# Altium PCB 12-LedMatrix(74138+74595).PcbDoc
Units mm, origin at the board's own origin, x right, y up, seen from the top; angles counter-clockwise.
Board outline 80 x 39.8 mm, 2 copper layers (Top Layer, Bottom Layer); 44 components, 102 nets, 315 pads, 32 vias.
Unrouted connection lines stored in the file: 180.
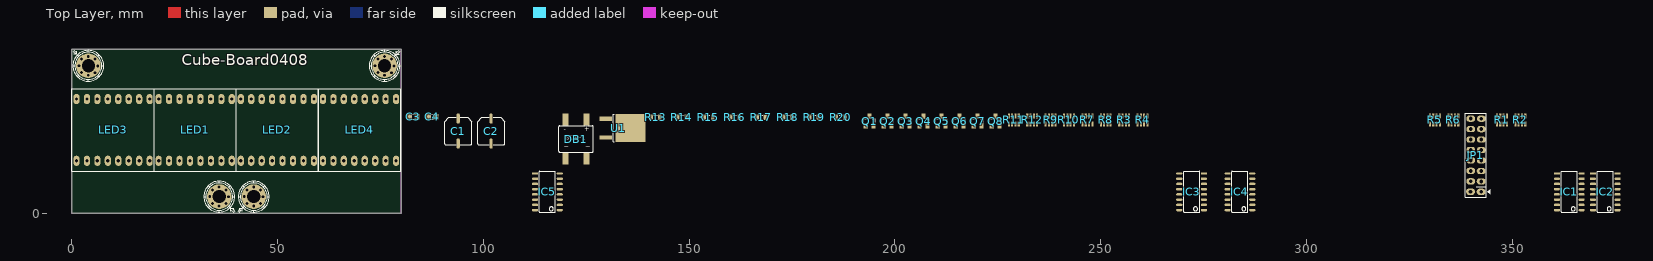
[diagram p0: Top Layer view]
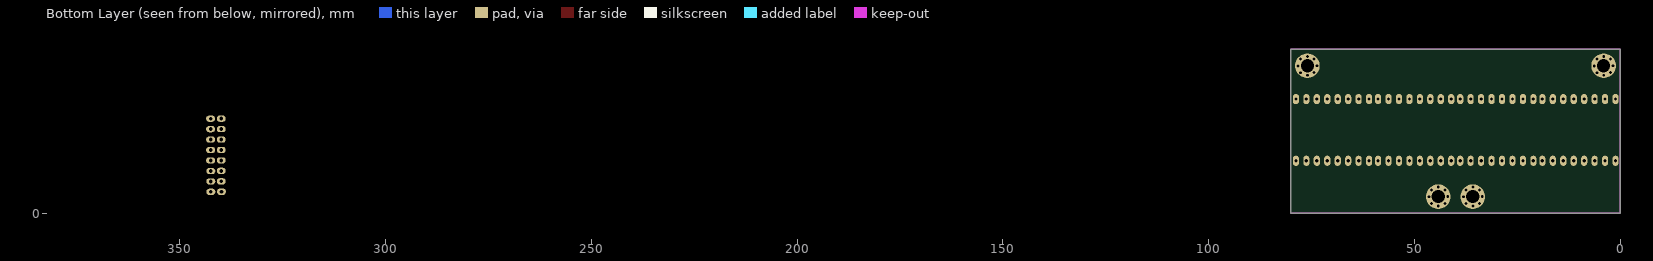
[diagram p1: Bottom Layer view, seen from below]

## Layer stack, top to bottom
Top Solder: solder mask 0.0102, Solder Resist, Dk 3.5
Top Layer: signal copper 0.0356
Dielectric 1: dielectric 0.32, FR-4, Dk 4.8
Bottom Layer: signal copper 0.0356
Bottom Solder: solder mask 0.0102, Solder Resist, Dk 3.5

## Board outline
0,0 80,0 80,39.8 0,39.8

## Design rules (kind name [scope] priority, off if disabled: settings)
Clearance [All] p1: gap=0.254
ComponentClearance [All] p1 off: gap=0.254 collisioncheckmode=3 verticalgap=0.254 showdistances=FALSE
PolygonConnect [All] p1: connectstyle=Relief reliefconductorwidth=0.254 reliefentries=4 polygonreliefangle="90 Angle" airgapwidth=0.254
RoutingVias [All] p1: holewidth=0.7 width=1 viastyle="Through Hole" minholewidth=0.7 minwidth=1 maxholewidth=1 maxwidth=2
SolderMaskExpansion [All] p1: expansion=0.102
Width [All] p1: maxlimit=0.254 minlimit=0.254 preferedwidth=0.254
29 further rules are at their usual default settings.

## Components (designator, comment, footprint, x,y, rotation, side; value= is the part's Value field where it differs from the comment)
C1 "470uF" C-ALU-D6.5 93.877,19.937 r0 top
C2 "470uF" C-ALU-D6.5 101.878,19.937 r0 top
C3 "104" C-0805 82.955,23.417 r0 top
C4 "104" C-0805 87.578,23.417 r0 top
DB1 "Diode Brideg" D-DB-1A-SMD 122.503,18.007 r0 top
IC1 "74HC595" SOIC-16 363.904,5.18 r90 top
IC2 "74HC595" SOIC-16 372.636,5.18 r90 top
IC3 "74HC595" SOIC-16 272.109,5.18 r90 top
IC4 "74HC595" SOIC-16 283.869,5.18 r90 top
IC5 "74138" SOIC-16 115.568,5.18 r90 top
JP1 "HEADER 8X2" JP8X2 342.492,5.18 r90 top
LED1 "8x8S" Matrix8x8-2x2mm 19.972,10.211 r0 top
LED2 "8x8S" Matrix8x8-2x2mm 39.936,10.211 r0 top
LED3 "8x8S" Matrix8x8-2x2mm 0.008,10.211 r0 top
LED4 "8x8S" Matrix8x8-2x2mm 59.901,10.211 r0 top
Q1 "A1015" SOT-23-3 193.877,22.376 r0 top
Q2 "A1015" SOT-23-3 198.245,22.376 r0 top
Q3 "A1015" SOT-23-3 202.614,22.376 r0 top
Q4 "A1015" SOT-23-3 206.983,22.376 r0 top
Q5 "A1015" SOT-23-3 211.377,22.376 r0 top
Q6 "A1015" SOT-23-3 215.746,22.376 r0 top
Q7 "A1015" SOT-23-3 220.115,22.376 r0 top
Q8 "A1015" SOT-23-3 224.484,22.376 r0 top
R1 "330R" R-Array-0603-4 347.521,22.63 r0 top
R2 "330R" R-Array-0603-4 351.992,22.63 r0 top
R3 "330R" R-Array-0603-4 255.726,22.63 r0 top
R4 "330R" R-Array-0603-4 260.196,22.63 r0 top
R5 "330R" R-Array-0603-4 331.24,22.63 r0 top
R6 "330R" R-Array-0603-4 335.71,22.63 r0 top
R7 "330R" R-Array-0603-4 246.785,22.63 r0 top
R8 "330R" R-Array-0603-4 251.255,22.63 r0 top
R9 "330R" R-Array-0603-4 237.844,22.63 r0 top
R10 "330R" R-Array-0603-4 242.314,22.63 r0 top
R11 "330R" R-Array-0603-4 228.903,22.63 r0 top
R12 "330R" R-Array-0603-4 233.374,22.63 r0 top
R13 "1K" R-0805 141.832,23.265 r0 top
R14 "1K" R-0805 148.258,23.265 r0 top
R15 "1K" R-0805 154.684,23.265 r0 top
R16 "1K" R-0805 161.111,23.265 r0 top
R17 "1K" R-0805 167.537,23.265 r0 top
R18 "1K" R-0805 173.963,23.265 r0 top
R19 "1K" R-0805 180.389,23.265 r0 top
R20 "1K" R-0805 186.815,23.265 r0 top
U1 "ASM1117" TO-252 133.806,20.649 r0 top

## Footprints (in the part's own frame and the unit in brackets; to place one, negate y for a bottom-side part, rotate by r counter-clockwise, add the part's x,y. Pads: shape width x height; smd on the part's side, far side on the other; paste and mask are expansions set on the pad)
C-0805 [mm] "Chip Capacitor, 2-Leads, Body 2.0x1.3mm, IPC Medium Density"
  rect 1.15x1.4 smd: 1(-0.925,0) 2(0.925,0)
  silkscreen extent -0.22,-0.6 0.23,0.6, body extent -1,-0.63 1,0.63, height 0.5
C-ALU-D6.5 [mm] "6.3x5.4mm"
  oval 0.8x2.5 smd: 1(0,3.038) 2(0,-3.038)
  silkscreen extent -3.3,-3.3 3.3,3.3, body extent -3.3,-3.8 3.3,3.8, height 6.25
D-DB-1A-SMD [mm] "DB106S"
  rect 1.5x3 smd: 1(-2.55,-4.713) 2(2.55,-4.713) 3(2.55,4.713) 4(-2.55,4.713)
  silkscreen extent -4.15,-3.18 4.15,3.18, body extent -4.15,-4.95 4.15,4.95, height 3.35
JP8X2 [mil]
  oval 60x86 hole 36: 1(-0.5,0.5) 2(99.5,0.5) 3(198.5,0.5) 4(299.5,-1.5) 5(399.5,-1.5) 6(499.5,-1.5) 7(599.5,-1.5) 8(699.5,-1.5) 9(0.5,101.5) 10(100,100) 11(200,100) 12(300,100) 13(400,100) 14(500,100) 15(600,100) 16(700,100)
  silkscreen extent -51,-85 750,151, body extent -50,-50 750,150, height 335
Matrix8x8-2x2mm [mm]
  oval 1.5x2.5 hole 0.8: 1(1.11,2.5) 2(3.65,2.5) 3(6.19,2.5) 4(8.73,2.5) 5(11.27,2.5) 6(13.81,2.5) 7(16.35,2.5) 8(18.89,2.5) 9(18.89,17.5) 10(16.35,17.5) 11(13.81,17.5) 12(11.27,17.5) 13(8.73,17.5) 14(6.19,17.5) 15(3.65,17.5) 16(1.11,17.5)
  silkscreen extent 0,0 20,20, body extent 0.07,0 20.07,20, height 6
R-0805 [mm] "Chip Resistor, 2-Leads, Body 2.0x1.3mm, IPC Medium Density"
  rect 0.9x1.35 smd: 1(-1.05,0) 2(1.05,0)
  silkscreen extent -0.38,-0.58 0.38,0.58, body extent -1,-0.63 1,0.63, height 0.5
R-Array-0603-4 [mm] "Chip Resistor Array, 4"
  rect 0.5x1.2 smd: 1(-1.2,-1) 2(-1.2,1) 3(-0.4,-1) 4(-0.4,1) 5(0.4,-1) 6(0.4,1) 7(1.2,-1) 8(1.2,1)
  body extent -1.6,-0.8 1.6,0.8, height 0.51
SOIC-16 [mm]
  oval 0.6x1.5 smd: 1(-4.445,-2.999) 2(-3.175,-2.999) 3(-1.905,-2.999) 4(-0.635,-2.999) 5(0.635,-2.999) 6(1.905,-2.999) 7(3.175,-2.999) 8(4.445,-2.999) 9(4.445,2.999) 10(3.175,2.999) 11(1.905,2.999) 12(0.635,2.999) 13(-0.635,2.999) 14(-1.905,2.999) 15(-3.175,2.999) 16(-4.445,2.999)
  silkscreen extent -4.95,-1.95 4.95,1.95, body extent -4.95,-3 4.95,3, height 1.3
SOT-23-3 [mm]
  rect 1x1.4 smd: 1(-0.95,-1.154) 2(0.95,-1.154) 3(0,1.154)
  silkscreen extent -1.4,-0.3 1.4,0.6, body extent -1.46,-1.15 1.46,1.15, height 1.22
TO-252 [mm] "AMS1117"
  rect 3x1 smd: 1(-4.1,2.29) 3(-4.1,-2.29)
  rect 7.2x6.8 smd: 2(1.95,0)
  silkscreen extent -2.2,-3.35 -2.05,3.35, body extent -4.55,-3.37 5.36,3.37, height 2.39

## Part data
C1 C2: library part CP1, "Cap P  0,1uF < 22uF , 16 - 50V"
C3 C4: library part CN
DB1: library part DB, "Convert AC to DC voltage, 4 pin"
IC1 IC2 IC3 IC4: library part 74595, "8 Bit Serial input - Parallel Output"
IC5: "3 -to- 8 Decoder - Out Low"
JP1: library part JP8X2
LED1 LED2 LED3 LED4: library part LED-8x8S
Q1 Q2 Q3 Q4 Q5 Q6 Q7 Q8: "PNP 600mW, ECB"
R1 R2 R3 R4 R5 R6 R7 R8 R9 R10 R11 R12: library part "Res Array 4", "RES ARRAY 4 RES 330 OHM 1206"
R13 R14 R15 R16 R17 R18 R19 R20: library part R, "Resistor 1/4W"

## Free pads (board coordinates)
  round 6 hole 3.2: GND1(35.8,4) GND2(44.2,4) VCC1(4,35.8) VCC2(76,35.8)

## Via types
v1: diameter 1, hole 0.7, Top Layer to Bottom Layer, 32 vias

## Nets (pads, with @x,y where several pads share a name; then routed paths per layer and width w, separated by ;. In a path a pad name is that pad's centre, name@x,y a point inside that pad or via, vN(x,y) a via of type N, cw(c..) or ccw(c..) an arc to the next point about the centre after c; other vN are vias at no path point)
+5V: C2.1 C4.2 IC1.10 IC1.16 IC2.10 IC2.16 IC3.10 IC3.16 IC4.10 IC4.16 IC5.16 JP1.7 JP1.15 Q1.1 Q2.1 Q3.1 Q4.1 Q5.1 Q6.1 Q7.1 Q8.1 U1.2
+12V: C1.1 C3.2 DB1.3 U1.3
COL1: LED1.9 LED2.9 LED3.9 LED4.9 Q1.2
COL2: LED1.14 LED2.14 LED3.14 LED4.14 Q2.2
COL3: LED1.8 LED2.8 LED3.8 LED4.8 Q3.2
COL4: LED1.12 LED2.12 LED3.12 LED4.12 Q4.2
COL5: LED1.1 LED2.1 LED3.1 LED4.1 Q5.2
COL6: LED1.7 LED2.7 LED3.7 LED4.7 Q6.2
COL7: LED1.2 LED2.2 LED3.2 LED4.2 Q7.2
COL8: LED1.5 LED2.5 LED3.5 LED4.5 Q8.2
D0: IC5.1 JP1.4 JP1.12
D1: IC5.2 JP1.5 JP1.13
D2: IC5.3 JP1.6 JP1.14
GND: C1.2 C2.2 C3.1 C4.1 DB1.4 IC1.8 IC1.13 IC2.8 IC2.13 IC3.8 IC3.13 IC4.8 IC4.13 IC5.4 IC5.5 IC5.6 IC5.8 JP1.8 JP1.16 U1.1
GND1: DB1.1 pad.GND1 pad.GND2
  other v1: 35.788,1.703 44.188,1.703 37.439,2.312 45.839,2.312 34.162,2.338 42.562,2.338 38.074,3.989 46.474,3.989 33.502,4.014 41.902,4.014 37.439,5.614 45.839,5.614 34.162,5.64 42.562,5.64 35.788,6.3 44.188,6.3
NetIC1_1: IC1.1 R1.3
NetIC1_2: IC1.2 R1.5
NetIC1_3: IC1.3 R3.3
NetIC1_4: IC1.4 R3.5
NetIC1_5: IC1.5 R5.3
NetIC1_6: IC1.6 R5.5
NetIC1_7: IC1.7 R1.7
NetIC1_15: IC1.15 R1.1
NetIC2_1: IC2.1 R2.3
NetIC2_2: IC2.2 R2.5
NetIC2_3: IC2.3 R4.3
NetIC2_4: IC2.4 R4.5
NetIC2_5: IC2.5 R6.3
NetIC2_6: IC2.6 R6.5
NetIC2_7: IC2.7 R2.7
NetIC2_15: IC2.15 R2.1
NetIC3_1: IC3.1 R7.3
NetIC3_2: IC3.2 R7.5
NetIC3_3: IC3.3 R9.3
NetIC3_4: IC3.4 R9.5
NetIC3_5: IC3.5 R11.3
NetIC3_6: IC3.6 R11.5
NetIC3_7: IC3.7 R3.7
NetIC3_15: IC3.15 R3.1
NetIC4_1: IC4.1 R8.3
NetIC4_2: IC4.2 R8.5
NetIC4_3: IC4.3 R10.3
NetIC4_4: IC4.4 R10.5
NetIC4_5: IC4.5 R12.3
NetIC4_6: IC4.6 R12.5
NetIC4_7: IC4.7 R4.7
NetIC4_15: IC4.15 R4.1
NetIC5_7: IC5.7 R20.1
NetIC5_9: IC5.9 R19.1
NetIC5_10: IC5.10 R18.1
NetIC5_11: IC5.11 R17.1
NetIC5_12: IC5.12 R16.1
NetIC5_13: IC5.13 R15.1
NetIC5_14: IC5.14 R14.1
NetIC5_15: IC5.15 R13.1
NetLED1_3: LED1.3 R1.4
NetLED1_4: LED1.4 R1.6
NetLED1_6: LED1.6 R3.6
NetLED1_10: LED1.10 R3.4
NetLED1_11: LED1.11 R5.4
NetLED1_13: LED1.13 R1.2
NetLED1_15: LED1.15 R5.6
NetLED1_16: LED1.16 R1.8
NetLED2_3: LED2.3 R2.4
NetLED2_4: LED2.4 R2.6
NetLED2_6: LED2.6 R4.6
NetLED2_10: LED2.10 R4.4
NetLED2_11: LED2.11 R6.4
NetLED2_13: LED2.13 R2.2
NetLED2_15: LED2.15 R6.6
NetLED2_16: LED2.16 R2.8
NetLED3_3: LED3.3 R7.4
NetLED3_4: LED3.4 R7.6
NetLED3_6: LED3.6 R9.6
NetLED3_10: LED3.10 R9.4
NetLED3_11: LED3.11 R11.4
NetLED3_13: LED3.13 R3.2
NetLED3_15: LED3.15 R11.6
NetLED3_16: LED3.16 R3.8
NetLED4_3: LED4.3 R8.4
NetLED4_4: LED4.4 R8.6
NetLED4_6: LED4.6 R10.6
NetLED4_10: LED4.10 R10.4
NetLED4_11: LED4.11 R12.4
NetLED4_13: LED4.13 R4.2
NetLED4_15: LED4.15 R12.6
NetLED4_16: LED4.16 R4.8
NetQ1_3: Q1.3 R13.2
NetQ2_3: Q2.3 R14.2
NetQ3_3: Q3.3 R15.2
NetQ4_3: Q4.3 R16.2
NetQ5_3: Q5.3 R17.2
NetQ6_3: Q6.3 R18.2
NetQ7_3: Q7.3 R19.2
NetQ8_3: Q8.3 R20.2
SDATA: IC1.14 JP1.1 JP1.9
SHCP: IC1.11 IC2.11 IC3.11 IC4.11 JP1.2 JP1.10
SOUT1: IC1.9 IC2.14
SOUT2: IC2.9 IC3.14
SOUT3: IC3.9 IC4.14
STCP: IC1.12 IC2.12 IC3.12 IC4.12 JP1.3 JP1.11
VCC1: DB1.2 pad.VCC1 pad.VCC2
  other v1: 3.988,33.503 75.988,33.503 5.639,34.112 77.639,34.112 2.362,34.138 74.362,34.138 6.274,35.789 78.274,35.789 1.702,35.814 73.702,35.814 5.639,37.414 77.639,37.414 2.362,37.44 74.362,37.44 3.988,38.1 75.988,38.1
pads on no net: IC4.9 R5.1 R5.2 R5.7 R5.8 R6.1 R6.2 R6.7 R6.8 R7.1 R7.2 R7.7 R7.8 R8.1 R8.2 R8.7 R8.8 R9.1 R9.2 R9.7 R9.8 R10.1 R10.2 R10.7 R10.8 R11.1 R11.2 R11.7 R11.8 R12.1 R12.2 R12.7 R12.8

## Keep-outs
Keep-Out Layer:
  lines w0.127: 0,0 40.2,0 80,0 80,39.8 39.8,39.8 0,39.8 0,0

## Silkscreen, mask and mechanical layers (free items; w line width, h text height)
Top Overlay:
  circle w0.127: c4,35.8 r3.291
  circle w0.127: c4,35.8 r3.747
  circle w0.127: c35.8,4 r3.291
  circle w0.127: c35.8,4 r3.747
  circle w0.127: c44.213,4 r3.291
  circle w0.127: c44.213,4 r3.747
  circle w0.127: c76,35.8 r3.291
  circle w0.127: c76,35.8 r3.747
  lines w0.127: 0.253,35.8 0.709,35.8 ; 0.254,39.302 0.762,38.794 ; 0.508,38.667 1.143,38.667 1.143,39.302 ; 0.508,39.556 1.016,39.048 ; 1.35,33.15 1.673,33.473 ; 1.35,38.45 1.673,38.127 ; 4,32.053 4,32.509 ; 4,39.091 4,39.547 ; 6.327,33.473 6.65,33.15 ; 6.327,38.127 6.65,38.45 ; 33.15,1.35 33.473,1.673 ; 33.15,6.65 33.473,6.327 ; 35.8,0.253 35.8,0.709 ; 35.8,7.291 35.8,7.747 ; 38.127,1.673 38.45,1.35 ; 38.127,6.327 38.45,6.65 ; 38.657,0.498 38.657,1.133 39.292,1.133 ; 38.784,0.752 39.292,0.244 ; 39.038,1.006 39.546,0.498 ; 39.091,4 39.547,4 ; 40.457,0.508 40.965,1.016 ; 40.466,4 40.922,4 ; 40.711,0.254 41.219,0.762 ; 40.711,1.143 41.346,1.143 41.346,0.508 ; 41.563,1.35 41.886,1.673 ; 41.563,6.65 41.886,6.327 ; 44.213,0.253 44.213,0.709 ; 46.54,1.673 46.863,1.35 ; 46.54,6.327 46.863,6.65 ; 47.504,4 47.961,4 ; 72.253,35.8 72.709,35.8 ; 73.35,33.15 73.673,33.473 ; 73.35,38.45 73.673,38.127 ; 76,39.091 76,39.547 ; 78.327,33.473 78.65,33.15 ; 78.327,38.127 78.65,38.45 ; 78.867,39.292 78.867,38.657 79.502,38.657 ; 78.994,39.038 79.502,39.546 ; 79.248,38.784 79.756,39.292 ; 79.291,35.8 79.747,35.8 ; 7.291,35.8 7.747,35.8 ; 7.291,35.8 7.747,35.8 ; 7.291,35.8 7.747,35.8 ; 32.053,4 32.509,4 ; 32.053,4 32.509,4 ; 32.053,4 32.509,4 ; 44.213,7.291 44.213,7.747 ; 44.213,7.291 44.213,7.747 ; 44.213,7.291 44.213,7.747 ; 76,32.053 76,32.509 ; 76,32.053 76,32.509 ; 76,32.053 76,32.509
  text "Cube-Board0408" at 26.67,35 h4.5
Mechanical 1:
  circle w0.003: c35.8,4.013 r3
  circle w0.003: c4,35.8 r3
  circle w0.003: c44.213,4 r3
  circle w0.003: c76,35.8 r3
  circle w0.003: c4,35.8 r1.6
  circle w0.003: c35.8,4 r1.6
  circle w0.003: c44.2,4 r1.6
  circle w0.003: c76,35.8 r1.6

## Text inside footprints (layer, text, board x,y; h text height)
DB1: Top Overlay "~        ~" at 119.582,15.213 h2; Top Overlay "-         +" at 119.582,19.404 h2; Top Overlay "SDB-1" at 119.995,17.367 h2